# Altium PCB Sensor Base PCB.PcbDoc
Units mm, origin at the board's own origin, x right, y up, seen from the top; angles counter-clockwise.
Board outline 75 x 95 mm, 2 copper layers (Top Layer, Bottom Layer); 22 components, 13 nets, 140 pads, 4 vias.
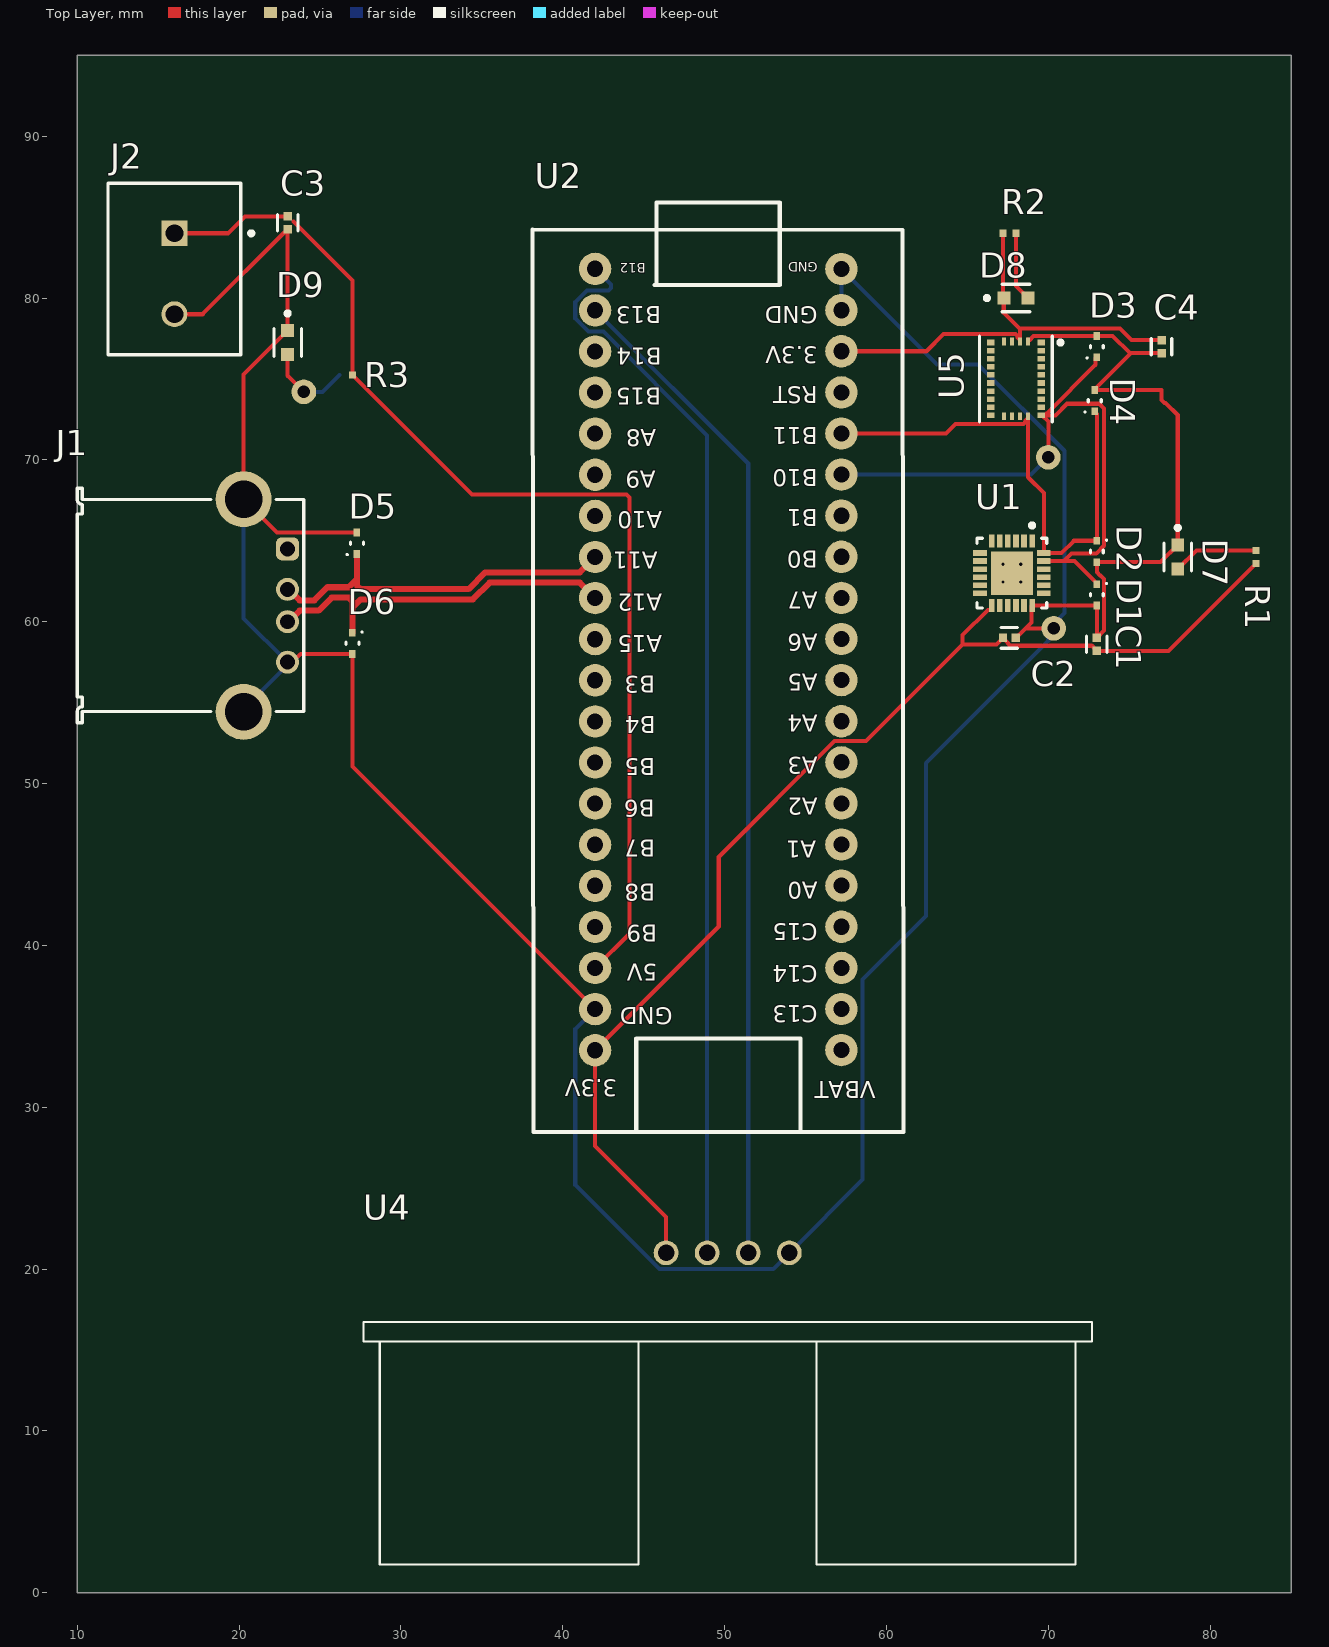
[diagram p0: Top Layer view]
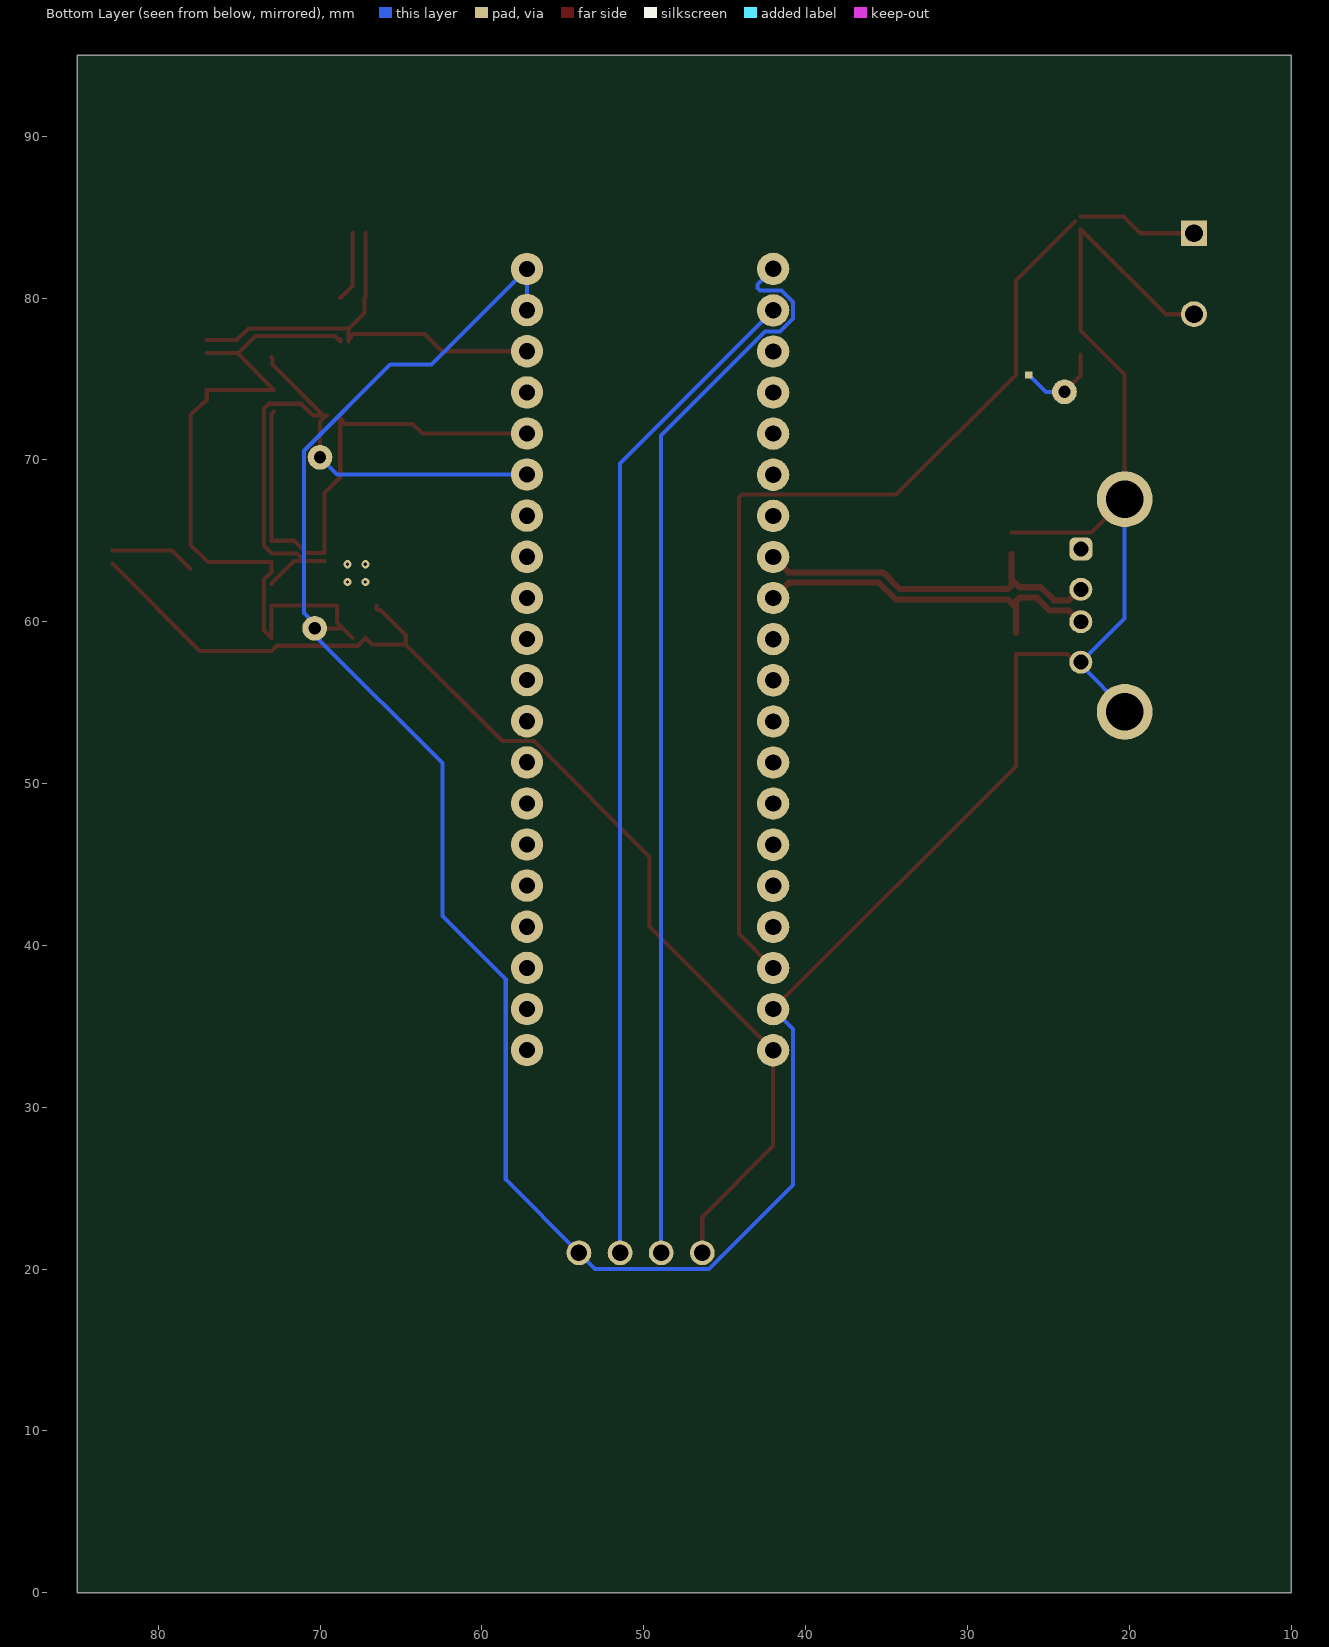
[diagram p1: Bottom Layer view, seen from below]
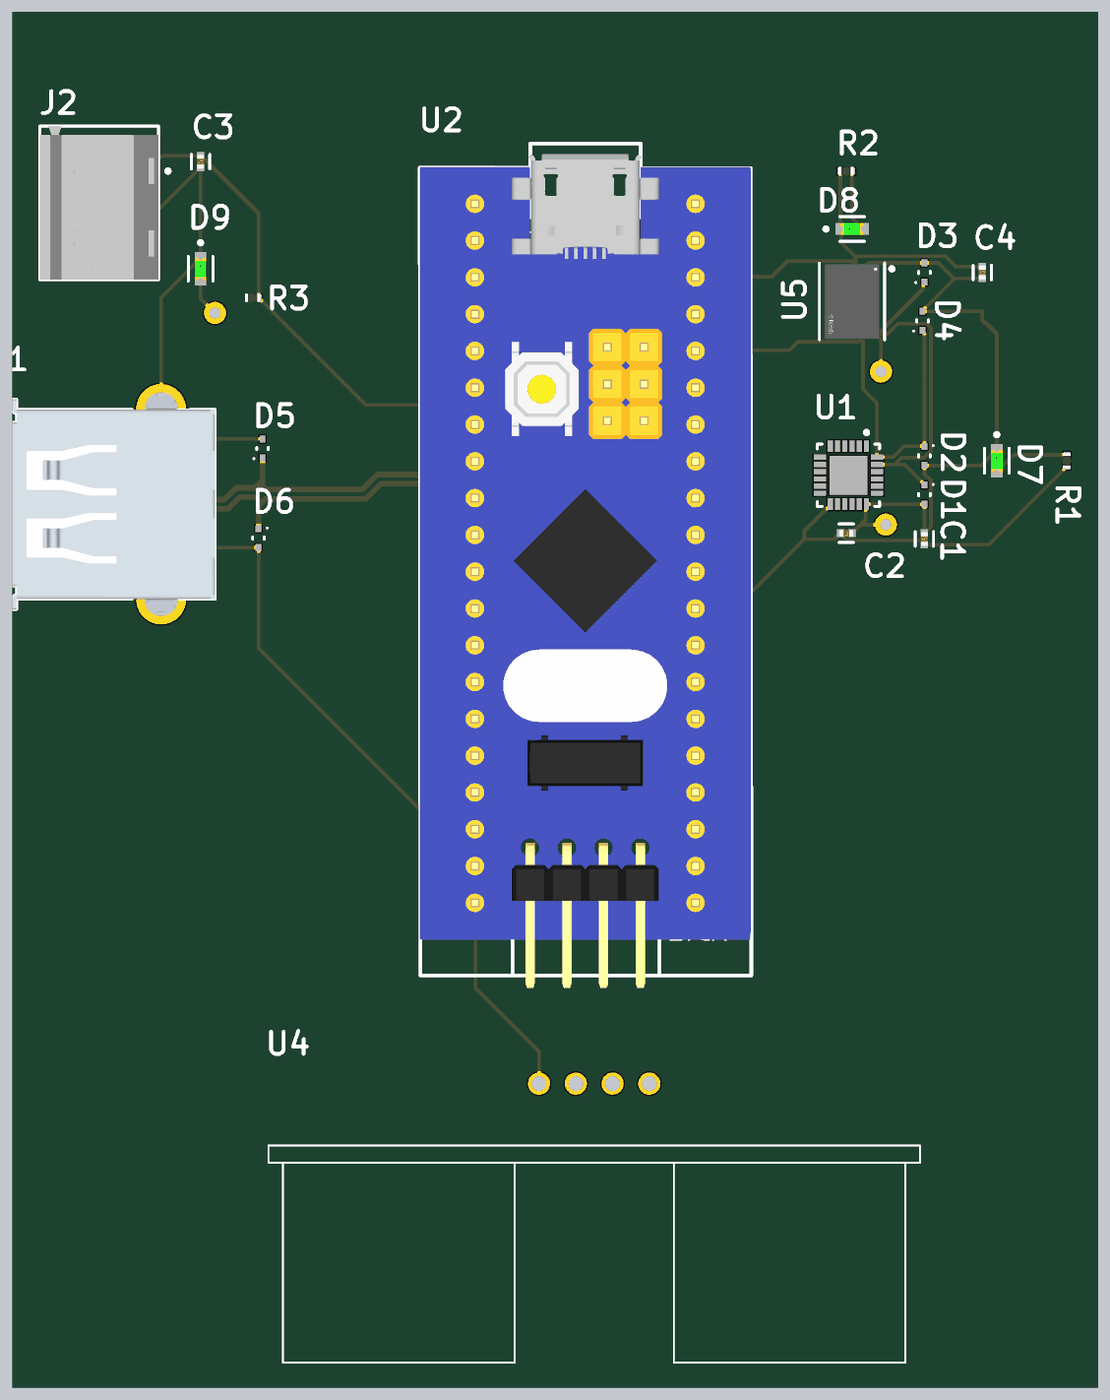
[diagram p2: 3D render of the assembled board from above, using the file's embedded part models]

## Layer stack, top to bottom
Top Solder: solder mask 0.0102, Solder Resist, Dk 3.5
Top Layer: signal copper 0.0356
Dielectric 1: dielectric 0.32, FR-4, Dk 4.8
Bottom Layer: signal copper 0.0356
Bottom Solder: solder mask 0.0102, Solder Resist, Dk 3.5

## Board outline
10,0 10,95 85,95 85,0

## Design rules (kind name [scope] priority, off if disabled: settings)
Clearance [All] p1: gap=0.2 ignorepadtopadclearanceinfootprint=FALSE except(0.1: Arc-SMDPad Arc-THPad Track-SMDPad Track-THPad SMDPad-SMDPad SMDPad-THPad)
DiffPairsRouting [All] p1: maxlimit=0.254 minlimit=0.254 mostfreqgap=0.254 toplayer_minwidth=0.381 toplayer_maxwidth=0.381 toplayer_prefwidth=0.381 bottomlayer_minwidth=0.381 bottomlayer_maxwidth=0.381 bottomlayer_prefwidth=0.381 maxuncoupledlength=12.7
HoleSize [All] p1: absolutevalues=TRUE maxlimit=6.3 minlimit=0.2 maxpercent=80.000 minpercent=20.000
MinimumAnnularRing [All] p1: minimumring=0.13
MinimumSolderMaskSliver [All] p1: minsoldermaskwidth=0.046
PolygonConnect [All] p1: connectstyle=Relief reliefconductorwidth=0.254 reliefentries=4 polygonreliefangle="90 Angle" airgapwidth=0.254
RoutingVias [All] p1: holewidth=0.711 width=1.27 viastyle="Through Hole" minholewidth=0.711 minwidth=1.27 maxholewidth=0.711 maxwidth=1.27
SilkToSilkClearance [All] p1: silktosilkclearance=0.16
SilkToSolderMaskClearance [IsPad] p1: minsilkscreentomaskgap=0.19 clearancetoexposedcopper=TRUE
SolderMaskExpansion [All] p1: expansion=0.102 istentingtop=FALSE
SupplyNets "Schematic Supply Nets" [InNet('GND')] p1: voltage=0.000
Width [All] p1: maxlimit=0.254 minlimit=0.254 preferedwidth=0.254
25 further rules are at their usual default settings.

## Classes and differential pairs
differential pair USB: +USB_P -USB_N

## Components (designator, comment, footprint, x,y, rotation, side; value= is the part's Value field where it differs from the comment)
C1 "C0402C104K8PACTU" FP-C0402-BB-MFG 73,58.6 r90 top value="0.10 μF"
C2 "C0402C104K8PACTU" FP-C0402-BB-MFG 67.6,59 r0 top value="0.10 μF"
C3 "C0402C104K8PACTU" FP-C0402-BB-MFG 23,84.65 r270 top value="0.10 μF"
C4 "C0402C104K8PACTU" FP-C0402-BB-MFG 77,77 r270 top value="0.10 μF"
D1 "ESD5Z3.3T1G" ONSC-SOD-523-2-502-01_V 73,61.66 r270 top
D2 "ESD5Z3.3T1G" ONSC-SOD-523-2-502-01_V 73,64.34 r270 top
D3 "ESD5Z3.3T1G" ONSC-SOD-523-2-502-01_V 73,77 r90 top
D4 "ESD5Z3.3T1G" ONSC-SOD-523-2-502-01_V 72.866,73.66 r90 top
D5 "ESD5Z3.3T1G" ONSC-SOD-523-2-502-01_V 27.28,64.847 r90 top
D6 "ESD5Z3.3T1G" ONSC-SOD-523-2-502-01_V 27,58.66 r270 top
D7 "LTST-C190GKT" FP-LTST-C190GKT-MFG 78,64 r270 top
D8 "LTST-C190GKT" FP-LTST-C190GKT-MFG 68,80 r0 top
D9 "LTST-C190GKT" FP-LTST-C190GKT-MFG 23,77.25 r270 top
J1 "61400416021" 61400416021 17,61 r270 top
J2 "282836-2" TECO-282836-2_V 16,81.5 r270 top
R1 "ERJ-2RKF1000X" RESC1005X40X25LL05T05#1 82.832,64 r270 top
R2 "ERJ-2RKF1000X" RESC1005X40X25LL05T05#1 67.6,84 r0 top
R3 "ERJ-2RKF1000X" RESC1005X40X25LL05T05#2 26.6,75.25 r180 top
U1 "MPU-6050" IS-QFN-24_V 67.75,63 r270 top
U2 "STM32F103C8T6" "Stm32 BluePill" 49.828,51.897 r180 top
U4 "HC-SR04" XCVR_HC-SR04 50.19,21 r0 top
U5 "BNO055" FP-BNO055-MFG 68,75 r0 top

## Footprints (in the part's own frame and the unit in brackets; to place one, negate y for a bottom-side part, rotate by r counter-clockwise, add the part's x,y. Pads: shape width x height; smd on the part's side, far side on the other; paste and mask are expansions set on the pad)
61400416021 [mm] "USB 2.0 Type A Horizontal"
  rrect50% 1.42x1.42 hole 0.92: 1(-3.5,5.99)
  round 1.42 hole 0.92: 2(-1,5.99) 3(1,5.99) 4(3.5,5.99)
  round 3.45 hole 2.3: Shell(-6.57,3.28) Shell(6.57,3.28)
  silkscreen extent -7.25,-7 7.25,7, body extent -8,-7 8,7, height 7.63
FP-BNO055-MFG [mm]
  rect 0.475x0.35 smd paste+0 mask-1000: 1(1.562,2.25) 6(-1.562,2.25) 7(-1.562,1.75) 8(-1.562,1.25) 9(-1.562,0.75) 10(-1.562,0.25) 11(-1.562,-0.25) 12(-1.562,-0.75) 13(-1.562,-1.25) 14(-1.562,-1.75) 15(-1.562,-2.25) 20(1.562,-2.25) 21(1.562,-1.75) 22(1.562,-1.25) 23(1.562,-0.75) 24(1.562,-0.25) 25(1.562,0.25) 26(1.562,0.75) 27(1.562,1.25) 28(1.562,1.75)
  rect 0.25x0.475 smd paste+0 mask-1000: 2(0.75,2.312) 3(0.25,2.312) 4(-0.25,2.312) 5(-0.75,2.312) 16(-0.75,-2.312) 17(-0.25,-2.312) 18(0.25,-2.312) 19(0.75,-2.312)
  silkscreen extent -2.25,-2.65 2.88,2.65, body extent -2.45,-3.15 2.45,3.15, height 0.25
FP-C0402-BB-MFG [mm]
  rect 0.52x0.52 smd paste+0 mask+0: 1(-0.4,0) 2(0.4,0)
  silkscreen extent -0.5,-0.64 0.5,0.64, body extent -0.8,-0.4 0.8,0.4, height 0.25
FP-LTST-C190GKT-MFG [mm]
  rect 0.8x0.8 smd paste+0 mask+0: 1(-0.75,0) 2(0.75,0)
  silkscreen extent -1.92,-0.85 0.85,0.85, body extent -1.25,-0.55 1.25,0.55, height 0.25
IS-QFN-24_V [mm] "QFN, 24-Leads, Body 4x4mm, Pitch 0.5mm, Thermal Pad 2.7x2.6mm"
  rect 0.8x0.35 smd: 1(-2,1.25) 2(-2,0.75) 3(-2,0.25) 4(-2,-0.25) 5(-2,-0.75) 6(-2,-1.25) 13(2,-1.25) 14(2,-0.75) 15(2,-0.25) 16(2,0.25) 17(2,0.75) 18(2,1.25)
  rect 0.35x0.85 smd mask+0.102: 7(-1.25,-1.975) 8(-0.75,-1.975) 9(-0.25,-1.975) 10(0.25,-1.975) 11(0.75,-1.975) 12(1.25,-1.975) 19(1.25,1.975) 20(0.75,1.975) 21(0.25,1.975) 22(-0.25,1.975) 23(-0.75,1.975) 24(-1.25,1.975)
  rect 2.7x2.6 smd: 25(0,0)
  silkscreen extent -3.07,-2.15 2.15,2.15, body extent -2,-2 2,2, height 0.95
ONSC-SOD-523-2-502-01_V [mm] "SOD, 2-Leads, Body 1.2x0.8mm"
  rect 0.48x0.4 smd: 1(-0.66,0) 2(0.66,0)
  silkscreen extent -0.75,-0.4 0.07,0.65, body extent -0.6,-0.4 0.6,0.4, height 0.7
RESC1005X40X25LL05T05#1 [mm] "Chip Resistor, 2-Leads, Body 1.05x0.55mm, IPC High Density"
  rect 0.45x0.45 smd: 1(-0.4,0) 2(0.4,0)
  body extent -0.53,-0.28 0.53,0.28, height 0.4
RESC1005X40X25LL05T05#2 [mm] "Chip Resistor, 2-Leads, Body 1.05x0.55mm, IPC High Density"
  rect 0.45x0.45 smd: 1(-0.4,0)
  rect 0.45x0.45 smd far side: 2(0.4,0)
  body extent -0.53,-0.28 0.53,0.28, height 0.4
"Stm32 BluePill" [mm]
  round 2 hole 1: 1(7.828,-29.909) 2(7.828,-27.343) 3(7.828,-24.803) 4(7.828,-22.263) 5(7.828,-19.723) 6(7.828,-17.183) 7(7.828,-14.643) 8(7.828,-12.103) 9(7.828,-9.563) 10(7.828,-7.023) 11(7.828,-4.483) 12(7.828,-1.943) 13(7.828,0.597) 14(7.828,3.137) 15(7.828,5.677) 16(7.828,8.217) 17(7.828,10.757) 18(7.828,13.297) 19(7.828,15.837) 20(7.828,18.377) 21(-7.386,18.366) 22(-7.386,15.826) 23(-7.386,13.286) 24(-7.386,10.746) 25(-7.386,8.206) 26(-7.386,5.666) 27(-7.386,3.126) 28(-7.386,0.586) 29(-7.386,-1.954) 30(-7.386,-4.494) 31(-7.386,-7.034) 32(-7.386,-9.574) 33(-7.386,-12.114) 34(-7.386,-14.654) 35(-7.386,-17.194) 36(-7.386,-19.734) 37(-7.386,-22.274) 38(-7.386,-24.814) 39(-7.386,-27.354) 40(-7.386,-29.894)
  silkscreen extent -11.22,-34 11.69,23.43, body extent -11.18,-33.27 11.68,24.29, height 12.31
TECO-282836-2_V [mm] "Female Header, Pitch 5mm, 1 x 2 Position, Height 10mm"
  rect 1.6x1.6 hole 1.1: 1(-2.5,0)
  round 1.6 hole 1.1: 2(2.5,0)
  silkscreen extent -5.6,-4.1 5,4.88, body extent -5.6,-4.1 5,4.1, height 10
XCVR_HC-SR04 [mm]
  round 1.53 hole 1.02: 1(-3.81,0) 2(-1.27,0) 3(1.27,0) 4(3.81,0)
  silkscreen extent -22.5,-19.27 22.5,-4.27

## Part data
C1 C2 C3 C4: library part CMP-2008-02046-2, "CAP CER 0.1UF 10V X5R 0402", Capacitance="0.10 μF", Manufacturer=Kemet, Package=C0402-BB, Temperature="-55°C to +125°C", Temperature Characteristic=X5R, Temperature Coefficient=15%, Temperature Range High=+125°C, Temperature Range Low=-55°C, Tolerance=0.1, Voltage Rating="10 V", Automotive=No, Category=Cap, ComponentLink2Description=Datasheet, ComponentLink2URL=https://content.kemet.com/datasheets/KEM_C1002_X7R_SMD.pdf, Device Class L1="Passive Components", Device Class L2=Capacitors, Device Class L3="Ceramic Capacitors", Digikey Description="CAP CER 0.1UF 10V X5R 0402", Height=0.55mm, Ipc Land Pattern Name=CAPC10050X50, Lead Free=Yes, Manufacturer Part Number=C0402C104K8PACTU, Material=Ceramic, Mouser Description="Capacitor 100 nF 10 VDC 0402", Octopart=https://octopart.com/c0402c104k8pactu-kemet-140039, RoHS=TRUE
D1 D2 D3 D4 D5 D6: library part CMP-1063-00098-1, "Transient Voltage Suppressor, Micro-Packaged Diode for ESD Protection, 2-Pin SOD-523, Pb-Free, Tape and Reel", Manufacturer="On Semiconductor", ComponentLink1Description="Manufacturer URL", ComponentLink1URL=http://www.onsemi.com/, ComponentLink2Description=Datasheet, ComponentLink2URL=http://www.onsemi.cn/pub_link/Collateral/ESD5Z2.5T1-D.PDF, ComponentLink3Description="Package Specification", ComponentLink3URL=http://www.onsemi.com/pub_link/Collateral/502-01.PDF, DatasheetVersion="Rev. 10", Direction=Unidirectional, IR Max (uA)=0.05, Mounting Technology="Surface Mount", Number of Lines=1, PackageDescription="2-Pin SOD, Body 1.2 x 0.8 mm", PackageReference=SOD-523-2-502-01, PackageVersion="Rev. E, 09/2010", Packing="Tape and Reel", PartNumber=ESD5Z3.3T1G, PPK Max (W)=158, RoHS=Pb-Free, V(BR) Min (V)=5, VRWM Max (V)=3.3
D7 D8 D9: library part CMP-22017-000005-2, "LED GREEN CLEAR CHIP SMD", Case Code (Imperial)=0603, Case Code (Metric)=1608, Color=Green, Forward Current=30mA, Forward Voltage=2.1V, Lens Color=Colorless, Max Operating Temperature=85°C, Min Operating Temperature=-55°C, Package Quantity=1, Power Dissipation=100mW, Reverse Voltage=5V, Test Current=10mA, Voltage=2V, Case/Package=0603, Depth=0.8mm, Dominant Wavelength=569nm, Height=0.8mm, Illumination Color=Green, Lead Free="Lead Free", Length=1.6mm, Lens Style=Clear, Lens Transparency=Clear, Luminous Intensity=6mcd, Mount="Surface Mount", Number of Elements=1, Number of LEDs=1, Number of Pins=2, Packaging="Tape and Reel", Power Rating=100mW, Radiation Hardening=No, Viewing Angle=130°, Wavelength=565nm, Width=0.8mm
J1: library part CMP-1502-03227-2, Color=White, Contact Resistance=20mΩ, Current Rating=1.5A, Flammability Rating="UL94 V-0", Insulation Resistance=1GΩ, Max Operating Temperature=105°C, Min Operating Temperature=-40°C, Operating Supply Voltage=30V, Connector Type=USB, Contact Material=Copper, Contact Plating=Gold, Gender=Receptacle, Insulation Material=PBT, Lead Free="Lead Free", Length=15.8mm, Mount="Horizontal, Through Hole", NexarPartId=21041530, Number of Contacts=4, Number of Pins=4, Number of Ports=1, Number of Positions=4, Orientation=Horizontal, REACH SVHC=Unknown, RoHS=Compliant, Termination=Solder, USB Standard="USB 2.0", Voltage Rating=30V, Voltage Rating (DC)=30V, Width=14.4mm
J2: library part CMP-1684-00017-1, "Female Header, Pitch 5 mm, 1 x 2 Position, Height 10 mm, Tail Length 3.5 mm, Rohs, Bulk", Color=Green, Current=13.5A, Manufacturer="TE Connectivity", Package Description="Female Header, Pitch 5 mm, 1 x 2 Position, Height 10 mm, Tail Length 3.5 mm", Package Reference=THD, Standard Package=300, Voltage=300V, 3D Model=282836-2.pdf, Category=Connectors,Interconnects, Clamp Material - Plating=Brass-NickelPlated, Contact Material - Plating=Brass-TinPlated, Datasheet URL=http://www.te.com.cn/commerce/DocumentDelivery/DDEController?Action=showdoc&DocId=Catalog+Section%7F1308389_EUROSTYLE_TERMINAL_BLOCKS%7F0607%7Fpdf%7FEnglish%7FENG_CS_1308389_EUROSTYLE_TERMINAL_BLOCKS_0607.pdf%7F282836-2, Dynamic Catalog=BuchananSeries, Family=TerminalBlocks-WiretoBoard, Featured Product=EurostyleTerminalBlockConnectors, Features=Interlocking(Side), Housing Material=Polyamide(PA66),Nylon6/6, Manufacturer URL=http://www.te.com, Mating Orientation=HorizontalwithBoard, Mounting Type=ThroughHole, Number of Levels=1, Other Names="5ULV-02B / A98076", Packaging=Bulk, Pitch="0.197\"(5.00mm)", Positions Per Level=2, Product Training Modules=Wire-to-BoardEurostyleTerminalBlocks, RoHS Information=282836-2StatementofCompliance, Screw Material - Plating=Brass-NickelPlated, Screw Thread=M3, Series=Buchanan, Torque - Screw=0.68Nm(6Lb-In), Wire Gauge=16-30AWG, Wire Termination=Screw-RisingCageClamp
R1 R2 R3: library part CMP-2002-00605-3, "Chip Resistor, 100 Ohm, +/- 1%, 100 mW, -55 to 155 degC, 0402 (1005 Metric), RoHS, Tape and Reel", Case Code (Imperial)=0402, Case Code (Metric)=1005, Manufacturer="Basic Passives", Max Operating Temperature="155 degC", Min Operating Temperature="-55 degC", Package Quantity=10000, Power Rating="100 mW", Resistance="100 Ohm", Tolerance=1%, Voltage Rating="50 V", Case\/Package=0402, ComponentLink1Description="Manufacturer URL", ComponentLink1URL=http://www.panasonic.com/, ComponentLink2Description=Datasheet, ComponentLink2URL=http://industrial.panasonic.com/cdbs/www-data/pdf/RDA0000/AOA0000C86.pdf, DatasheetVersion=04/2015, Height="0.35 mm", Length="1 mm", Mount="Surface Mount", Mounting Technology="Surface Mount", PackageDescription="2-Pin Surface Mount Device, Body 1 x 0.5 mm", PackageReference=0402, Packaging="Tape and Reel", PartNumber=ERJ-2RKF1000X, Pins=2, Radiation Hardening=No, REACH SVHC=Yes, RoHSCompliant=true, Width="0.5 mm"
U1: library part CMP-1753-00002-2, "3-Axis Gyroscope, Accelerometer and a Digital Motion Processor(TM) (DMP), 2.375 to 3.46 V, -40 to 85 degC, 24-Pin QFN, RoHS, Tape and Reel", Manufacturer=InvenSense, Standard Package=5,000, Category=Sensors,Transducers, Datasheet URL=http://datasheet.octopart.com/MPU-6050-InvenSense-datasheet-14421344.pdf, Datasheet Version="Rev. 3.3, 05/2012", Dynamic Catalog=MPU-6000™Series, Family=Multifunction, Featured Product=MPU-60506-Axis,IntegratedI²CSolution, Manufacturer URL=http://www.invensense.com/, Online Catalog=MPU-6000™Series, Other Names="1428-1007-2 / MPU6050", Output Type=Digital, Sensor Type=MotionTracking, Unit PriceUSD=Digital
U2: library part BluePill, "Designed By @Alixahedi"
U4: "Ultrasonic Sensor Module", Package=None, Availability=Unavailable, MP=HC-SR04, Price=None
U5: library part CMP-2000-05075-4, "IMU ACCEL/GYRO/MAG I2C 28LGA", Case/Package=LGA, Max Operating Temperature=85°C, Min Operating Temperature=-40°C, Lead Free="Lead Free", Mount="Surface Mount", Output Type=I2C, Packaging="Tape and Reel", Sensor Type=Accelerometer

## Free pads (board coordinates)
  round 1.524 hole 0.762: 2(24,74.2) 8(70.002,70.155) 9(70.333,59.588)

## Via types
v1: diameter 0.5, hole 0.2, Top Layer to Bottom Layer, 4 vias

## Nets (pads, with @x,y where several pads share a name; then routed paths per layer and width w, separated by ;. In a path a pad name is that pad's centre, name@x,y a point inside that pad or via, vN(x,y) a via of type N, cw(c..) or ccw(c..) an arc to the next point about the centre after c; other vN are vias at no path point)
+3.3V: C1.1 C2.1 R1.2 U1.13 U2.20 U4.1 | length 74.1
  Top Layer w0.254: U4.1 46.38,23.22 42,27.6 U2.20 49.638,41.158 49.638,45.47 56.792,52.624 58.742,52.624 64.706,58.588 ; U1.13 66.5,60.775 66.452,60.727 66.265,60.727 64.706,59.168 64.706,58.588 ; R1.2 77.432,58.2 C1.1 72.687,58.513 67.646,58.513 67.513,58.646 67.513,58.687 C2.1 66.788,58.588 64.706,58.588
+5V: C3.1 J2.1 R3.1 U2.18 | length 68.6
  Top Layer w0.254: J2.1 19.312,84 20.362,85.05 C3.1 ; 23.354,84.737 27,81.091 R3.1 34.397,67.853 43.936,67.853 44.12,67.669 44.12,40.72 U2.18
GND: C1.2 C2.2 C3.2 C4.2 D1.2 D2.2 D3.2 D4.2 D5.2 D6.2 D7.1 D9.1 J1.4 J1.Shell J2.2 pad.9 U1.18 U2.19 U2.39 U2.40 U4.4 U5.2 | length 234.5
  Top Layer w0.254: J2.2 17.75,79 C3.2 D9.1 20.28,75.28 20.28,67.57 22.343,65.507 D5.2 ; J1.4 23.306,57.5 23.806,58 D6.2 27,51.06 U2.19 ; U2.40@57.007,81.998 U2.40 ; C2.2 68.588,59.588 ; U5.2 68.75,77.421 68.752,77.423 68.858,77.423 69.087,77.652 69.196,77.652 69.204,77.66 71.969,77.66 71.977,77.652 72.106,77.652 ; pad.9 68.588,59.588 ; 72.106,77.66 D3.2 73.978,77.66 75.038,76.6 ; C4.2 75.038,76.6 ; 68.588,59.588 68.952,59.952 68.952,60.952 U1.18 D1.2 C1.2 73.454,59.454 73.454,62.627 73.225,62.857 73.202,62.857 73,63.059 D2.2 76.93,63.68 D7.1 78,72.761 77.245,73.517 77.182,73.517 77,73.699 77,74.32 D4.2 72.866,74.36 75.038,76.532 75.038,76.6
  Bottom Layer w0.254: J1.Shell@20.28,54.43 20.28,54.61 22.99,57.32 J1.4 20.28,60.21 J1.Shell@20.28,67.57 ; U2.19 40.773,34.833 40.773,25.204 45.969,20.008 53.008,20.008 U4.4 58.522,25.522 58.522,37.897 62.433,41.808 62.433,51.257 69.994,58.818 69.994,58.906 70.333,59.245 pad.9 70.333,59.887 70.991,60.546 70.991,70.564 65.663,75.892 63.113,75.892 U2.40 U2.39
NetC4_1: C4.1 D8.1 R2.1 U2.38 U5.3 | length 27.9
  Top Layer w0.254: U2.38 62.462,76.711 63.528,77.777 67.969,77.777 68.102,77.644 68.102,77.569 U5.3@68.25,77.421 ; R2.1 67.2,80.05 D8.1 67.25,79.074 68.25,78.074 ; U5.3 U5.3@68.25,77.421 ; C4.1 75.15,77.4 74.423,78.127 68.303,78.127 68.25,78.074 ; U5.3@68.25,77.421 68.25,78.074
NetD1_1: D1.1 D3.1 pad.8 U1.23 U2.35 U5.20 | length 40.3
  Top Layer w0.254: U5.20 U5.20@69.625,72.75 ; U1.23 70.968,63.75 ; 69.894,72.848 72.927,75.881 72.927,76.267 D3.1 ; pad.8 70.002,72.373 U5.20@69.625,72.75 ; D1.1 73,62.36 71.61,63.75 70.968,63.75 ; U5.20@69.625,72.75 70.446,72.75 71.163,73.467 73.16,73.467 73.454,73.173 73.454,64.693 72.965,64.204 71.422,64.204 70.968,63.75
  Bottom Layer w0.254: U2.35 68.938,69.091 pad.8
NetD2_1: D2.1 D4.1 U1.24 U2.36 U5.19 | length 32.3
  Top Layer w0.254: U2.36 63.681,71.631 64.273,72.223 68.469,72.223 68.602,72.356 68.602,72.431 68.75,72.579 68.75,68.925 69.725,67.95 U1.24 70.826,64.25 71.576,65 D2.1 73,72.826 72.866,72.96 D4.1
NetD7_2: D7.2 R1.1 | length 5.3
  Top Layer w0.254: D7.2 79.15,64.4 R1.1
NetD8_2: D8.2 R2.2 | length 4.3
  Top Layer w0.254: R2.2 68,80.75 D8.2
NetD9_2: D9.2 pad.2 R3.2 | length 5.3
  Top Layer w0.254: D9.2 23,75.2 pad.2
  Bottom Layer w0.254: pad.2 25.15,74.2 R3.2
NetU2_1: U2.1 U4.2 | length 66.8
  Bottom Layer w0.254: U2.1 42.977,80.829 42.977,80.618 42.825,80.467 41.492,80.467 40.773,79.748 40.773,78.732 41.578,77.927 42.508,77.927 48.92,71.515 U4.2
NetU2_2: U2.2 U4.3 | length 62.2
  Bottom Layer w0.254: U2.2 51.46,69.78 U4.3
USB_N: D5.1 J1.2 U2.8 | length 22.7
  Top Layer w0.381: J1.2 23.05,62 23.733,61.317 24.644,61.317 25.455,62.129 26.777,62.129 27.28,62.631 ; D5.1 27.28,62.631 ; U2.8 U2.8 41.046,63.047 35.212,63.047 34.177,62.013 27.503,62.013 27.28,62.236 27.28,62.631
USB_P: D6.1 J1.3 U2.9 | length 22.7
  Top Layer w0.381: J1.3 23.05,60 23.733,60.682 24.907,60.682 25.718,61.494 26.777,61.494 27,61.271 27,60.875 ; D6.1 27,60.875 ; U2.9 U2.9 41.046,62.412 35.475,62.412 34.44,61.378 27.503,61.378 27,60.875
pads on no net: J1.1 U1.1 U1.2 U1.3 U1.4 U1.5 U1.6 U1.7 U1.8 U1.9 U1.10 U1.11 U1.12 U1.14 U1.15 U1.16 U1.17 U1.19 U1.20 U1.21 U1.22 U1.25 U2.3 U2.4 U2.5 U2.6 U2.7 U2.10 U2.11 U2.12 U2.13 U2.14 U2.15 U2.16 U2.17 U2.21 U2.22 U2.23 U2.24 U2.25 U2.26 U2.27 U2.28 U2.29 U2.30 U2.31 U2.32 U2.33 U2.34 U2.37 U5.1 U5.4 U5.5 U5.6 U5.7 U5.8 U5.9 U5.10 U5.11 U5.12 U5.13 U5.14 U5.15 U5.16 U5.17 U5.18 U5.21 U5.22 U5.23 U5.24 U5.25 U5.26 U5.27 U5.28
copper on no net:
  other v1: 67.2,62.45 68.3,62.45 67.2,63.55 68.3,63.55

## Text inside footprints (layer, text, board x,y; h text height)
J1: Mechanical 2 "PCB Edge" at 8.78,63.2 h0.81 r270
U2: Top Overlay "B12" at 45.129,82.377 h1 r180; Top Overlay "GND" at 55.741,82.417 h1 r180; Top Overlay "B13" at 46.089,79.843 h1.78 r180; Top Overlay "GND" at 55.741,79.843 h1.78 r180; Top Overlay "A1" at 55.67,46.817 h1.78 r180; Top Overlay "A0" at 55.741,44.257 h1.78 r180; Top Overlay "C14" at 55.741,39.126 h1.78 r180; Top Overlay "C13" at 55.741,36.637 h1.78 r180; Top Overlay "C15" at 55.741,41.692 h1.78 r180; Top Overlay "B6" at 45.678,49.337 h1.78 r180; Top Overlay "B4" at 45.741,54.488 h1.78 r180; Top Overlay "B7" at 45.708,46.868 h1.78 r180; Top Overlay "B14" at 46.11,77.271 h1.78 r180; Top Overlay "B5" at 45.708,51.903 h1.78 r180; Top Overlay "VBAT" at 59.352,31.958 h1.78 r180; Top Overlay "A10" at 46.143,67.168 h1.78 r180; Top Overlay "A12" at 46.143,62.082 h1.78 r180; Top Overlay "A15" at 46.143,59.497 h1.78 r180; Top Overlay "A9" at 45.741,69.657 h1.78 r180; Top Overlay "B3" at 45.708,57.008 h1.78 r180; Top Overlay "A11" at 45.856,64.648 h1.78 r180; Top Overlay "A8" at 45.772,72.223 h1.78 r180; Top Overlay "B15" at 46.079,74.788 h1.78 r180; Top Overlay "3.3V" at 55.741,77.353 h1.78 r180; Top Overlay "B1" at 55.741,67.289 h1.78 r180; Top Overlay "B0" at 55.741,64.73 h1.78 r180; Top Overlay "A7" at 55.741,62.184 h1.78 r180; Top Overlay "A6" at 55.741,59.599 h1.78 r180; Top Overlay "B11" at 55.741,72.344 h1.78 r180; Top Overlay "B10" at 55.741,69.759 h1.78 r180; Top Overlay "RST" at 55.741,74.89 h1.78 r180; Top Overlay "A4" at 55.741,54.589 h1.78 r180; Top Overlay "A3" at 55.741,52.004 h1.78 r180; Top Overlay "A2" at 55.741,49.458 h1.78 r180; Top Overlay "A5" at 55.741,57.11 h1.78 r180; Top Overlay "GND" at 46.78,36.51 h1.78 r180; Top Overlay "3.3V" at 43.351,32.065 h1.78 r180; Top Overlay "B8" at 45.708,44.156 h1.78 r180; Top Overlay "B9" at 45.835,41.616 h1.78 r180; Top Overlay "5V" at 45.835,39.203 h1.78 r180